# Altium PCB final_project.PcbDoc
Units mm, origin at the board's own origin, x right, y up, seen from the top; angles counter-clockwise.
Board outline 100 x 75 mm, 2 copper layers (Top Layer, Bottom Layer); 47 components, 31 nets, 192 pads, 0 vias.
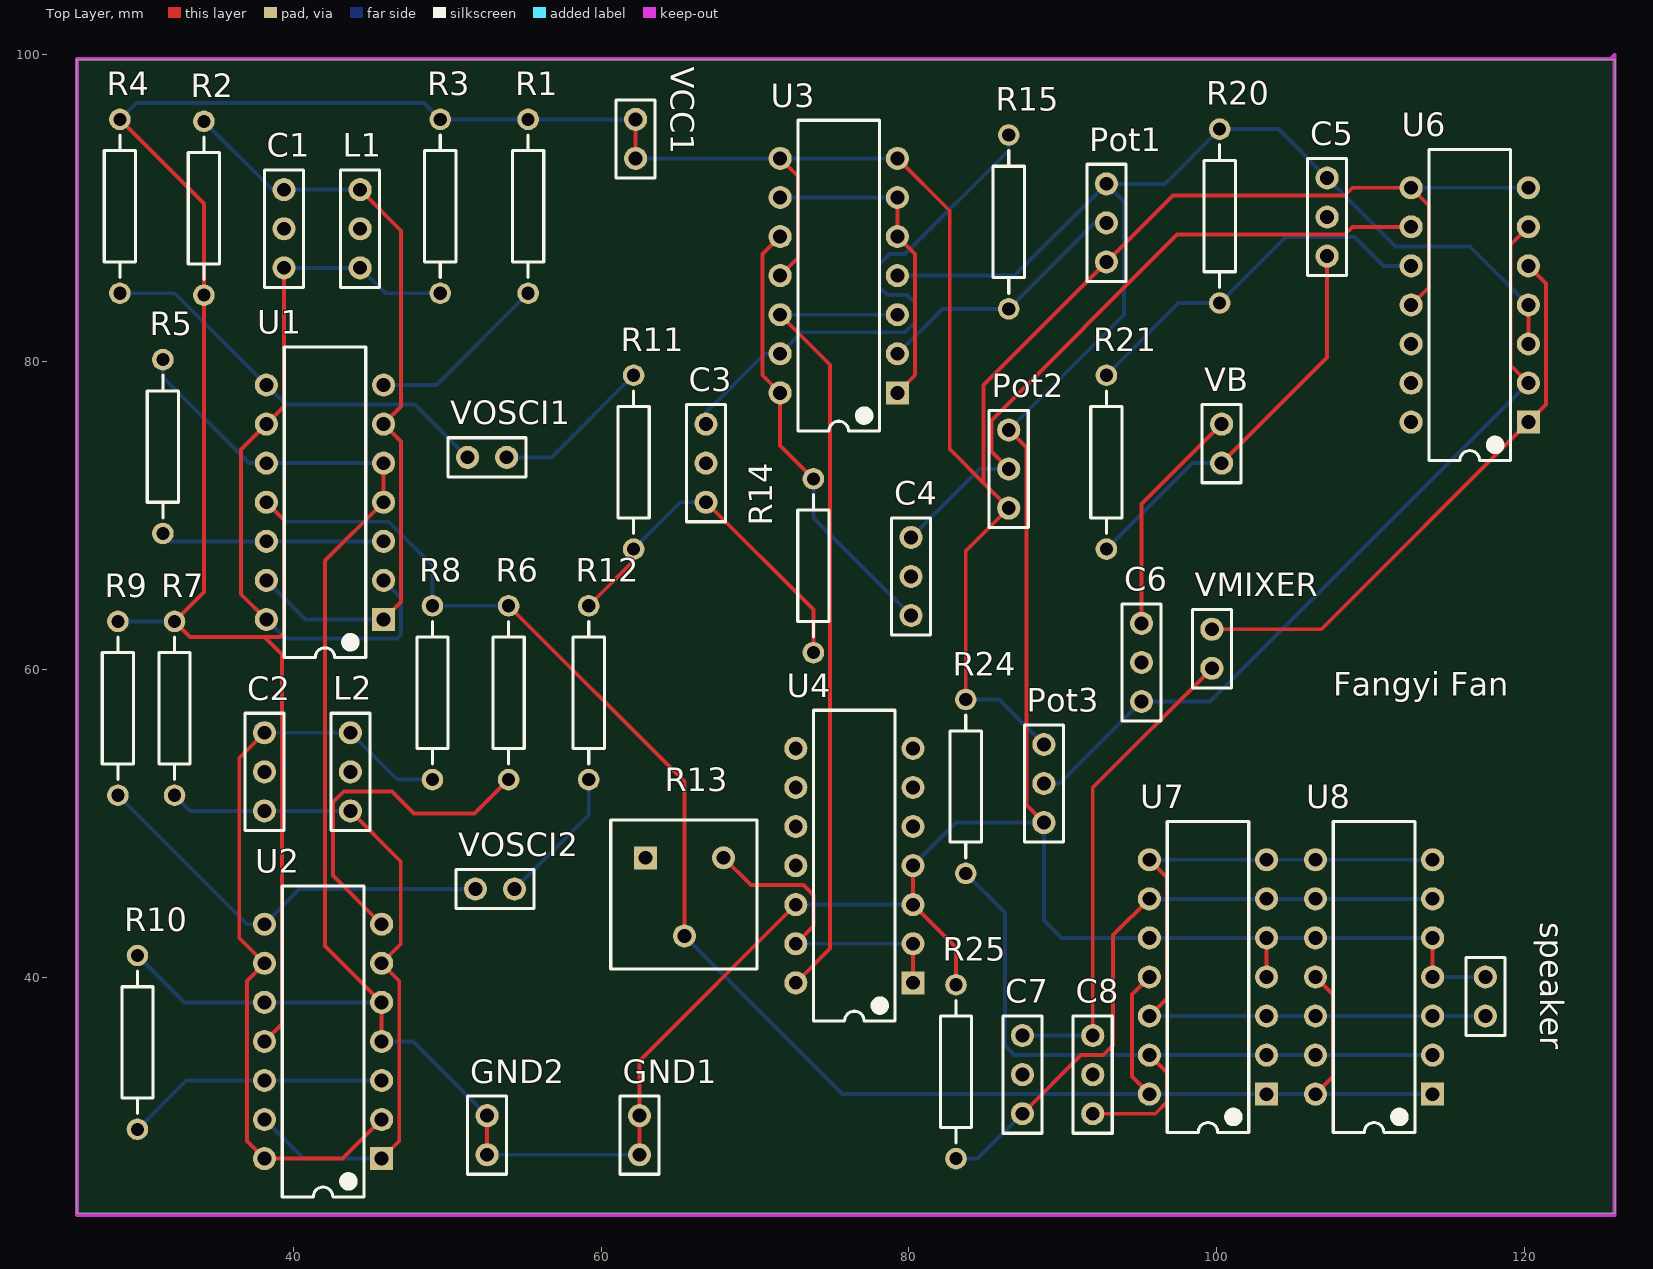
[diagram p0: Top Layer view]
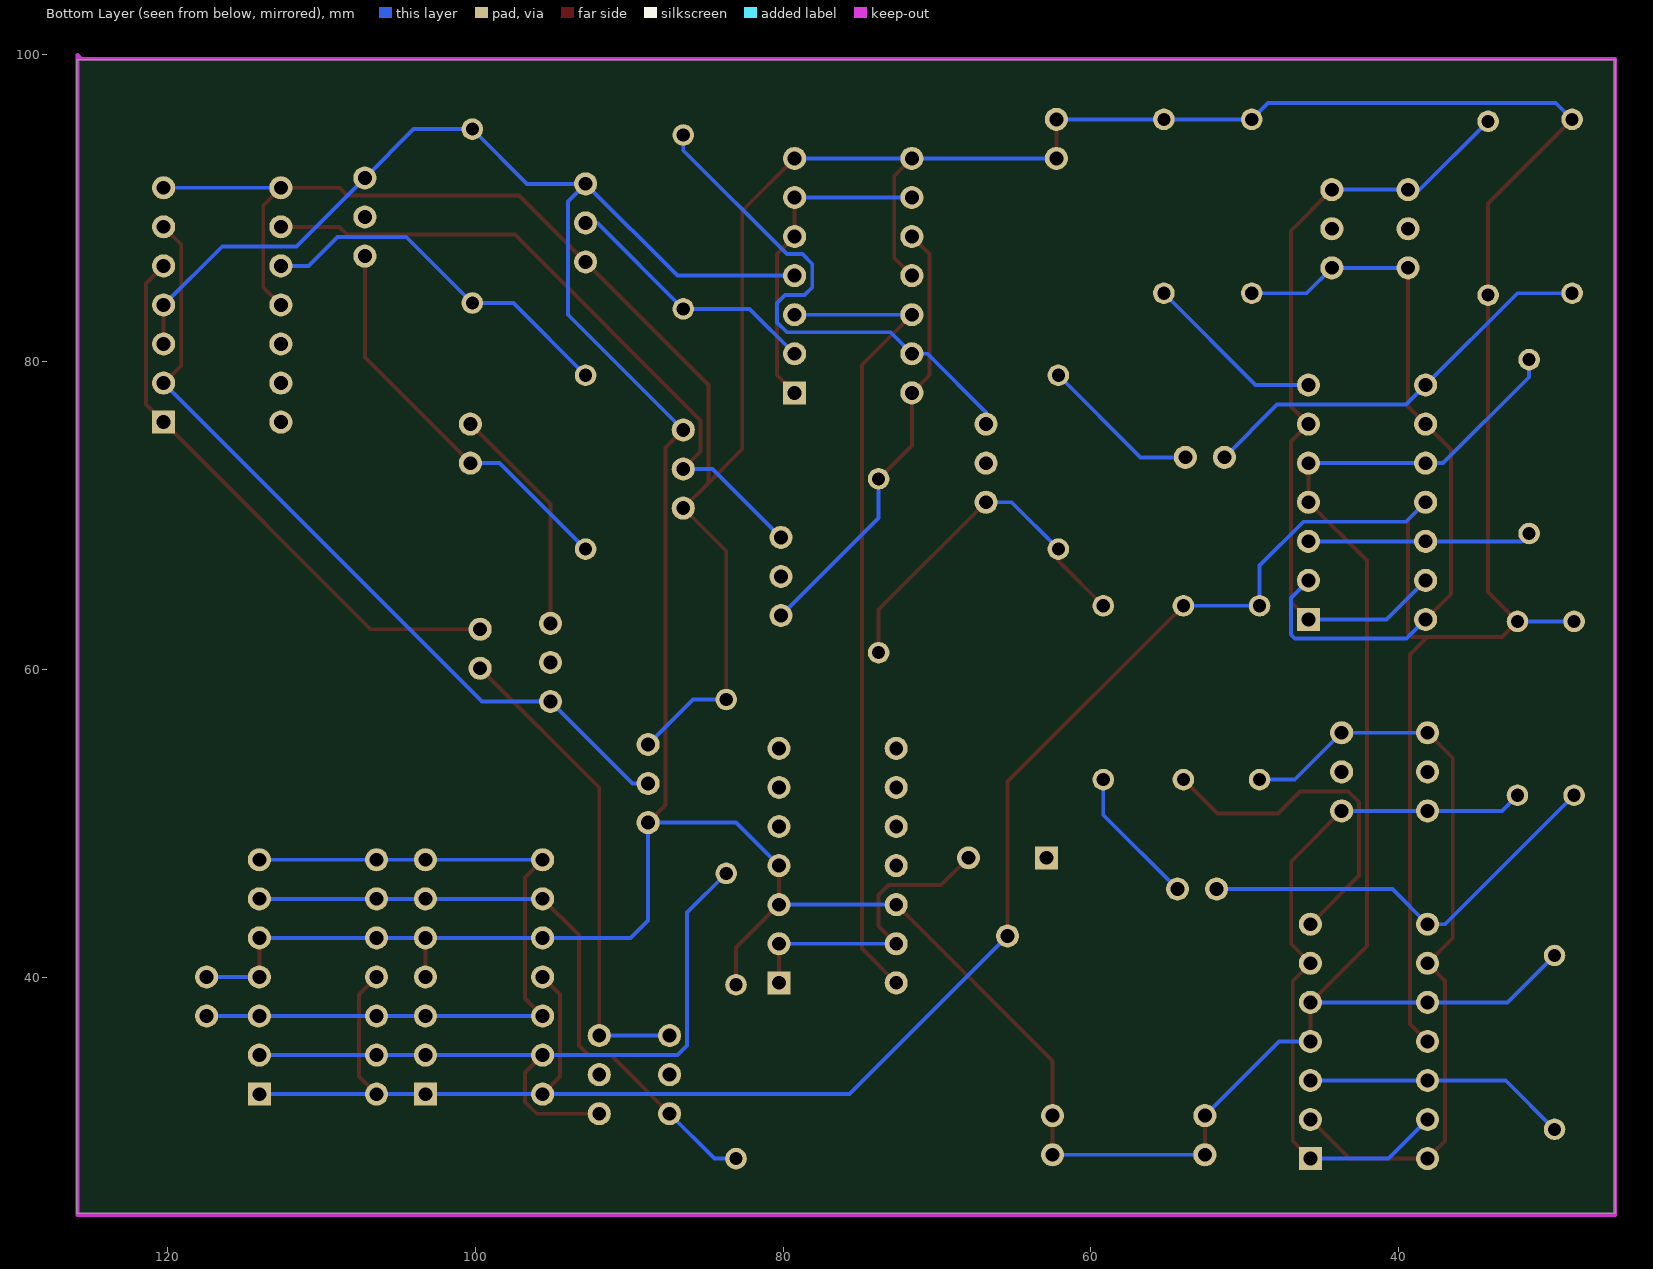
[diagram p1: Bottom Layer view, seen from below]

## Layer stack, top to bottom
Top Solder: solder mask 0.0102, Solder Resist, Dk 3.5
Top Layer: signal copper 0.0356
Dielectric 1: dielectric 0.32, FR-4, Dk 4.8
Bottom Layer: signal copper 0.0356
Bottom Solder: solder mask 0.0102, Solder Resist, Dk 3.5

## Board outline
25.908,24.638 125.908,24.638 125.908,99.638 25.908,99.638

## Design rules (kind name [scope] priority, off if disabled: settings)
Clearance [All] p1: gap=0.254 ignorepadtopadclearanceinfootprint=FALSE except(0: Arc-Hole Track-Hole SMDPad-Hole THPad-Hole Via-Hole Fill-Hole Poly-Hole Region-Hole Text-Hole)
PolygonConnect [All] p1: connectstyle=Relief reliefconductorwidth=0.254 reliefentries=4 polygonreliefangle="90 Angle" airgapwidth=0.254
RoutingVias [All] p1: holewidth=0.711 width=1.27 viastyle="Through Hole" minholewidth=0.711 minwidth=1.27 maxholewidth=0.711 maxwidth=1.27
SilkToSolderMaskClearance [IsPad] p1: minsilkscreentomaskgap=0 clearancetoexposedcopper=TRUE
SolderMaskExpansion [All] p1: expansion=0.102
Width [All] p1: maxlimit=0.254 minlimit=0.254 preferedwidth=0.254
29 further rules are at their usual default settings.

## Components (designator, comment, footprint, x,y, rotation, side; value= is the part's Value field where it differs from the comment)
C1 "Female Connector_3" Connector_3 39.37,88.519 r270 top value=1nF
C2 "Female Connector_3" Connector_3 38.1,53.467 r90 top value=1nF
C3 "Female Connector_3" Connector_3 66.802,73.533 r90 top value=1nF
C4 "Female Connector_3" Connector_3 80.137,66.167 r90 top value=1nF
C5 "Female Connector_3" Connector_3 107.188,89.535 r90 top value=1nF
C6 "Female Connector_3" Connector_3 95.123,60.325 r270 top value=1nF
C7 "Female Connector_3" Connector_3 87.376,33.528 r270 top value=1nF
C8 "Female Connector_3" Connector_3 91.948,33.528 r270 top value=1nF
GND1 "Male Connector_2" Connector_2 62.484,29.718 r90 top
GND2 "Male Connector_2" Connector_2 52.578,29.718 r90 top
L1 "Female Connector_3" Connector_3 44.323,88.519 r270 top value=1nF
L2 "Female Connector_3" Connector_3 43.688,53.467 r90 top value=1nF
Pot1 "Female Connector_3" Connector_3 92.837,89.154 r90 top value=1nF
Pot2 "Female Connector_3" Connector_3 86.487,73.152 r90 top value=1nF
Pot3 "Female Connector_3" Connector_3 88.773,52.451 r270 top value=1nF
R1 "Res" RES 55.372,89.535 r90 top value=10K
R2 "Res" RES 34.036,90.551 r270 top value=100K
R3 "Res" RES 49.657,89.535 r90 top value=100K
R4 "Res" RES 28.829,89.535 r90 top value=10K
R5 "Res" RES 31.369,75.057 r270 top value=10K
R6 "Res" RES 54.102,57.912 r90 top value=10K
R7 "Res" RES 32.385,56.896 r90 top value=100K
R8 "Res" RES 49.149,57.912 r90 top value=100K
R9 "Res" RES 28.702,56.896 r90 top value=10K
R10 "Res" RES 29.718,36.322 r270 top value=10K
R11 "Res" RES 62.23,72.898 r90 top value=10K
R12 "Res" RES 59.309,57.912 r90 top value=10K
R13 "Rpot" Rpot10 65.405,47.752 r90 top value=10K
R14 "Res" RES 73.914,66.167 r90 top value=100K
R15 "Res" RES 86.614,88.519 r90 top value=1000K
R20 "Res" RES 100.076,90.043 r270 top value=2K
R21 "Res" RES 92.964,72.898 r90 top value=100
R24 "Res" RES 83.82,51.816 r90 top value=100K
R25 "Res" RES 82.931,34.417 r270 top value=100K
speaker "Male Connector_2" Connector_2 117.475,38.735 r90 top
U1 "ALD1103" ALD1103 42.037,70.866 r90 top
U2 "ALD1103" ALD1103 41.91,35.814 r90 top
U3 "ALD1103" ALD1103 75.438,85.598 r90 top
U4 "ALD1103" ALD1103 76.454,47.244 r90 top
U6 "ALD1103" ALD1103 116.459,83.693 r90 top
U7 "ALD1103" ALD1103 99.441,40.005 r90 top
U8 "ALD1103" ALD1103 110.236,40.005 r90 top
VB "Male Connector_2" Connector_2 100.33,74.676 r90 top
VCC1 "Male Connector_2" Connector_2 62.23,94.488 r90 top
VMIXER "Male Connector_2" Connector_2 99.695,61.341 r270 top
VOSCI1 "Male Connector_2" Connector_2 52.578,73.787 r0 top
VOSCI2 "Male Connector_2" Connector_2 53.086,45.72 r180 top

## Footprints (in the part's own frame and the unit in brackets; to place one, negate y for a bottom-side part, rotate by r counter-clockwise, add the part's x,y. Pads: shape width x height; smd on the part's side, far side on the other; paste and mask are expansions set on the pad)
ALD1103 [mm] "DIP14"
  rect 1.5x1.5 hole 0.9: 1(-7.62,-3.81)
  round 1.5 hole 0.9: 2(-5.08,-3.81) 3(-2.54,-3.81) 4(0,-3.81) 5(2.54,-3.81) 6(5.08,-3.81) 7(7.62,-3.81) 8(7.62,3.81) 9(5.08,3.81) 10(2.54,3.81) 11(0,3.81) 12(-2.54,3.81) 13(-5.08,3.81) 14(-7.62,3.81)
  silkscreen extent -10.1,-2.65 10.1,2.65
Connector_2 [mm]
  round 1.5 hole 0.9: 1(-1.27,0) 2(1.27,0)
  silkscreen extent -2.54,-1.27 2.54,1.27
Connector_3 [mm]
  round 1.5 hole 0.9: 1(-2.667,0) 2(-0.127,0) 3(2.413,0)
  silkscreen extent -3.94,-1.27 3.68,1.27
RES [mm]
  round 1.4 hole 0.85: 1(-5.08,0.127) 2(6.223,0.127)
  silkscreen extent -4.06,-0.89 5.21,1.14
Rpot10 [mm]
  rect 1.5x1.5 hole 0.9: 1(0,2.54)
  round 1.5 hole 0.9: 2(0,-2.54) 3(-5.08,0)
  silkscreen extent -7.24,-4.71 2.45,4.79

## Part data
R1 R2 R3 R4 R5 R6 R7 R8 R9 R10 R11 R12 R14 R15 R20 R21 R24 R25: library part Resistor
R13: library part Rpot_10K

## Nets (pads, with @x,y where several pads share a name; then routed paths per layer and width w, separated by ;. In a path a pad name is that pad's centre, name@x,y a point inside that pad or via, vN(x,y) a via of type N, cw(c..) or ccw(c..) an arc to the next point about the centre after c; other vN are vias at no path point)
GND: C5.3 GND1.1 GND1.2 GND2.1 GND2.2 Pot1.3 Pot2.3 Pot3.3 R5.1 R10.1 R20.1 R25.1 speaker.2 U1.4 U1.5 U1.10 U2.4 U2.5 U2.10 U3.4 U4.3 U4.4 U4.12 U6.3 U6.4 U7.4 U7.5 U7.10 U8.4 U8.5 U8.10 | length 282.5
  Top Layer w0.254: U2.4 U2.5 42.049,42.025 42.049,67.068 U1.4 U1.5 ; GND2.1 GND2.2 ; GND1.1 GND1.2 62.484,34.544 U4.12 ; U4.4 U4.3 83.058,41.91 R25.1 ; Pot2.3 87.63,74.422 87.63,51.181 Pot3.3 ; U7.4 U7.5 ; U8.4 U8.5 ; U6.3 U6.4
  Bottom Layer w0.254: R10.1 32.893,38.354 U2.10 U2.5 ; R5.1 31.496,78.994 37.084,73.406 U1.10 U1.5 ; U2.4 47.752,35.814 GND2.2 ; GND2.1 GND1.1 ; U4.12 U4.3 ; U3.4 86.868,85.598 Pot1.3 ; U4.4 83.058,50.038 Pot3.3 88.773,43.688 89.916,42.545 U7.10 U7.5 U8.10 U8.5 ; Pot2.3 93.98,83.058 93.98,90.424 Pot1.3 ; U8.4 speaker.2 ; U6.4 116.459,87.503 111.633,87.503 C5.3 104.013,95.123 R20.1 96.647,91.567 Pot1.3
NetC1_1: C1.1 L1.1 R2.1 U1.1 U1.6 U1.13 | length 51.1
  Top Layer w0.254: L1.1 46.99,88.519 46.99,77.089 U1.6 46.99,74.803 46.99,64.389 U1.1
  Bottom Layer w0.254: R2.1 38.608,91.186 C1.1 L1.1 ; U1.13 40.767,63.246 U1.1
NetC1_3: C1.3 L1.3 R3.1 U1.2 U1.9 U1.14 | length 48.9
  Top Layer w0.254: U1.14 36.588,64.885 36.588,74.307 U1.9 39.37,77.089 C1.3
  Bottom Layer w0.254: U1.14 39.472,62.001 46.736,62.001 46.99,62.255 46.99,64.643 U1.2 ; C1.3 L1.3 45.974,84.455 R3.1
NetC2_1: C2.1 L2.1 R7.1 U2.1 U2.6 U2.13 | length 45.9
  Top Layer w0.254: L2.1 46.965,47.523 46.965,42.139 U2.6 46.863,39.751 46.863,29.337 U2.1
  Bottom Layer w0.254: R7.1 33.274,50.8 C2.1 L2.1 ; U2.13 40.64,28.194 U2.1
NetC2_3: C2.3 L2.3 R8.1 U2.2 U2.9 U2.14 | length 50.8
  Top Layer w0.254: C2.3 36.461,54.241 36.461,42.533 U2.9 36.957,39.751 36.957,29.337 U2.14 43.18,28.194 U2.2
  Bottom Layer w0.254: C2.3 L2.3 46.736,52.832 R8.1
NetC3_1: C3.1 R11.1 R12.2 R14.1 | length 23.5
  Top Layer w0.254: R12.2 62.103,67.056 R11.1 ; C3.1 73.787,63.881 R14.1
  Bottom Layer w0.254: R11.1 65.151,70.866 C3.1
NetC3_3: C3.3 R15.2 U3.13 | length 34.7
  Bottom Layer w0.254: C3.3 66.802,76.708 70.612,80.518 U3.13 73.025,81.915 79.756,81.915 80.391,82.55 80.391,83.82 79.883,84.328 78.613,84.328 78.105,84.836 78.105,86.36 78.74,86.995 79.756,86.995 86.487,93.726 R15.2
NetC4_1: C4.1 R14.2 U3.10 U3.14 | length 29.1
  Top Layer w0.254: U3.10 70.485,86.995 70.485,79.121 U3.14 71.628,74.549 R14.2
  Bottom Layer w0.254: R14.2 73.787,69.85 C4.1
NetC4_3: C4.3 Pot2.2 U6.9 | length 44.3
  Top Layer w0.254: Pot2.2 85.356,74.156 85.356,76.187 97.434,88.265 108.331,88.265 108.839,88.773 U6.9
  Bottom Layer w0.254: C4.3 84.582,73.025 Pot2.2
NetC5_1: C5.1 R21.1 VB.1 | length 26.1
  Top Layer w0.254: VB.1 107.188,80.264 C5.1
  Bottom Layer w0.254: R21.1 98.425,73.406 VB.1
NetC6_1: C6.1 VB.2 | length 15.1
  Top Layer w0.254: C6.1 95.123,70.739 VB.2
NetC6_3: C6.3 Pot3.2 U6.2 U6.6 | length 53.4
  Top Layer w0.254: U6.2 119.126,79.756 119.126,87.63 U6.6
  Bottom Layer w0.254: Pot3.2 89.789,52.578 C6.3 99.568,57.912 U6.2
NetC7_1: C7.1 C8.1 VMIXER.2 | length 31.7
  Top Layer w0.254: C8.1 91.948,52.324 VMIXER.2
  Bottom Layer w0.254: C7.1 C8.1
NetC7_3: C7.3 R25.2 U7.6 U7.9 U8.6 U8.9 | length 42.2
  Top Layer w0.254: C7.3 91.186,34.925 92.634,34.925 93.269,35.56 93.269,42.723 U7.9
  Bottom Layer w0.254: R25.2 84.455,28.194 C7.3 ; U7.9 U7.6 U8.9 U8.6
NetC8_3: C8.3 R24.1 U7.2 U7.13 U8.2 U8.13 | length 49
  Top Layer w0.254: C8.3 96.012,31.115 96.774,31.877 96.774,33.782 U7.13
  Bottom Layer w0.254: R24.1 86.233,44.196 86.233,35.56 86.868,34.925 U7.13 U7.2 U8.13 U8.2
NetPot1_2: Pot1.2 R15.1 U3.2 | length 17.1
  Bottom Layer w0.254: U3.2 82.169,83.439 R15.1 92.075,89.027 Pot1.2
NetR1_1: R1.1 U1.7 | length 11.9
  Bottom Layer w0.254: U1.7 49.276,78.486 R1.1
NetR4_1: R4.1 U1.8 VOSCI1.1 | length 27
  Bottom Layer w0.254: R4.1 32.258,84.455 U1.8 39.497,77.216 47.879,77.216 VOSCI1.1
NetR5_2: R5.2 U1.3 U1.12 | length 14.6
  Bottom Layer w0.254: R5.2 32.004,68.326 U1.12 U1.3
NetR6_1: R6.1 U2.7 | length 22.5
  Top Layer w0.254: U2.7 42.557,46.597 42.557,51.371 43.256,52.07 46.38,52.07 47.828,50.622 51.765,50.622 R6.1
NetR9_1: R9.1 U2.8 VOSCI2.2 | length 27.7
  Bottom Layer w0.254: R9.1 36.957,43.434 U2.8 40.386,45.72 VOSCI2.2
NetR10_2: R10.2 U2.3 U2.12 | length 17.2
  Bottom Layer w0.254: R10.2 33.02,33.274 U2.12 U2.3
NetR11_2: R11.2 VOSCI1.2 | length 10.5
  Bottom Layer w0.254: VOSCI1.2 56.769,73.787 R11.2
NetR12_1: R12.1 VOSCI2.1 | length 9.1
  Bottom Layer w0.254: VOSCI2.1 59.182,50.546 R12.1
NetR13_2: R13.2 U4.1 U4.2 U4.13 | length 20.6
  Top Layer w0.254: R13.2 69.723,45.974 73.152,45.974 73.787,45.339 73.787,43.307 U4.13 ; U4.1 U4.2
  Bottom Layer w0.254: U4.13 U4.2
NetR20_2: R20.2 R21.2 U6.10 | length 24.3
  Bottom Layer w0.254: R21.2 97.536,83.82 R20.2 104.496,88.113 108.966,88.113 110.846,86.233 U6.10
Netspeaker_1: speaker.1 U7.3 U7.7 U7.8 U7.12 U8.3 U8.7 U8.8 U8.12 | length 51.4
  Top Layer w0.254: U7.12 96.774,38.608 96.774,46.482 U7.8
  Bottom Layer w0.254: U7.12 U7.3 U8.12 U8.3 speaker.1 ; U7.8 U7.7 U8.8 U8.7
NetU3_1: U3.1 U3.5 U3.6 U3.9 | length 21.3
  Top Layer w0.254: U3.1 80.391,79.121 80.391,86.995 U3.5 U3.6
  Bottom Layer w0.254: U3.9 U3.6
NetU3_3: U3.3 U3.12 U4.14 | length 53.3
  Top Layer w0.254: U3.12 74.879,79.807 74.879,41.859 U4.14
  Bottom Layer w0.254: U3.12 U3.3
NetU6_1: U6.1 U6.5 VMIXER.1 | length 37.3
  Top Layer w0.254: VMIXER.1 106.807,62.611 U6.1 121.412,77.216 121.412,85.09 U6.5
VCC: Pot1.1 Pot2.1 Pot3.1 R1.2 R2.2 R3.2 R4.2 R6.2 R7.2 R8.2 R9.2 R13.3 R24.2 U1.11 U2.11 U3.7 U3.8 U3.11 U6.7 U6.8 U6.11 U7.1 U7.11 U7.14 U8.1 U8.11 U8.14 VCC1.1 VCC1.2 | length 363.4
  Top Layer w0.254: R4.2 34.163,90.297 R2.2 34.163,65.024 R7.2 33.274,62.103 38.1,62.103 ; U2.11 39.243,36.957 39.243,60.96 38.1,62.103 ; U1.11 39.37,69.723 39.37,62.357 39.116,62.103 38.1,62.103 ; R6.2 65.405,52.705 R13.3 ; VCC1.1 VCC1.2 ; U3.11 72.771,86.741 72.771,92.075 U3.8 ; U3.7 82.652,89.814 82.652,74.32 84.848,72.124 ; R24.2 83.693,67.691 Pot2.1 84.848,72.124 ; U7.14 94.488,33.528 94.488,38.862 U7.11 ; U8.14 107.569,33.528 107.569,38.862 U8.11 ; U6.11 113.792,84.836 113.792,90.17 U6.8 108.839,91.313 108.331,90.805 97.155,90.805 Pot1.1 84.848,78.498 84.848,72.124
  Bottom Layer w0.254: R9.2 R7.2 ; R4.2 29.769,96.825 48.463,96.825 R3.2 R1.2 VCC1.2 ; U1.11 39.497,69.596 46.177,69.596 49.022,66.751 R8.2 R6.2 ; VCC1.1 U3.8 U3.7 ; R13.3 75.692,32.385 U7.14 U7.1 U8.14 U8.1 ; R24.2 85.852,58.039 Pot3.1 ; U6.8 U6.7
pads on no net: C1.2 C2.2 C3.2 C4.2 C5.2 C6.2 C7.2 C8.2 L1.2 L2.2 R13.1 U4.5 U4.6 U4.7 U4.8 U4.9 U4.10 U4.11 U6.12 U6.13 U6.14

## Keep-outs
Keep-Out Layer:
  lines w0.254: 25.908,24.511 125.857,24.511 125.857,99.949 125.603,99.695 25.908,99.695 25.908,81.788 25.908,24.511

## Silkscreen, mask and mechanical layers (free items; w line width, h text height)
Top Overlay:
  text "Fangyi Fan" at 107.569,58.293 h1.52